# Altium PCB OpenHeat.PcbDoc (part 1 of 2)
Units mm, origin at the board's own origin, x right, y up, seen from the top; angles counter-clockwise.
Board outline 51.05 x 26.04 mm, 2 copper layers (Top1, Bottom4), stack 1.271 mm thick; 76 components, 78 nets, 393 pads, 281 vias.
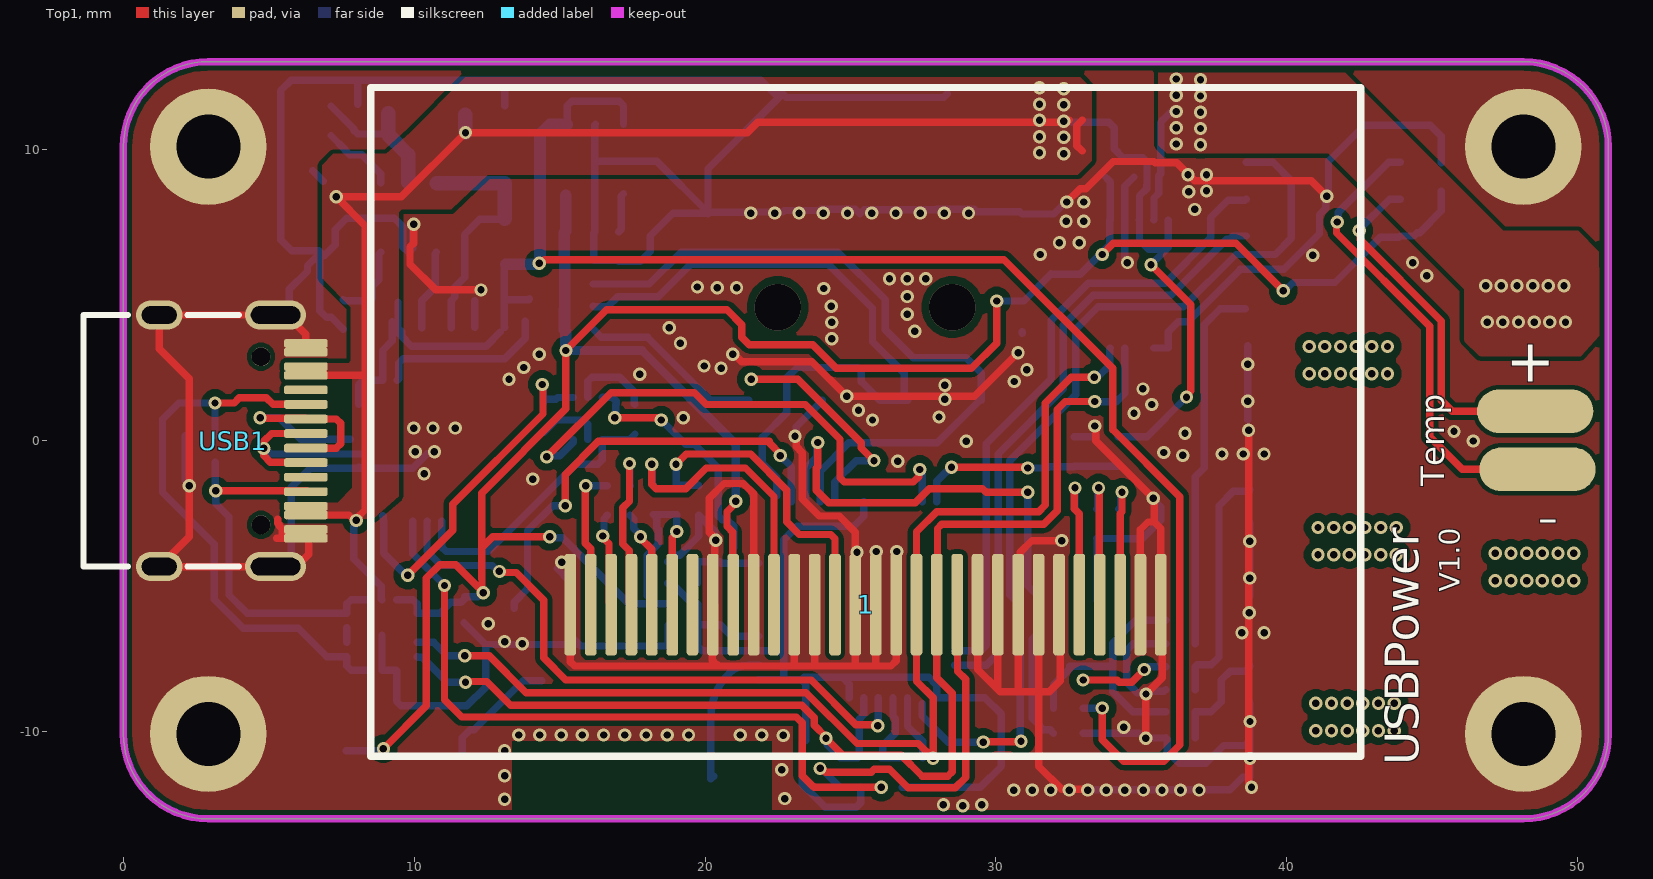
[diagram p0: Top1 view]
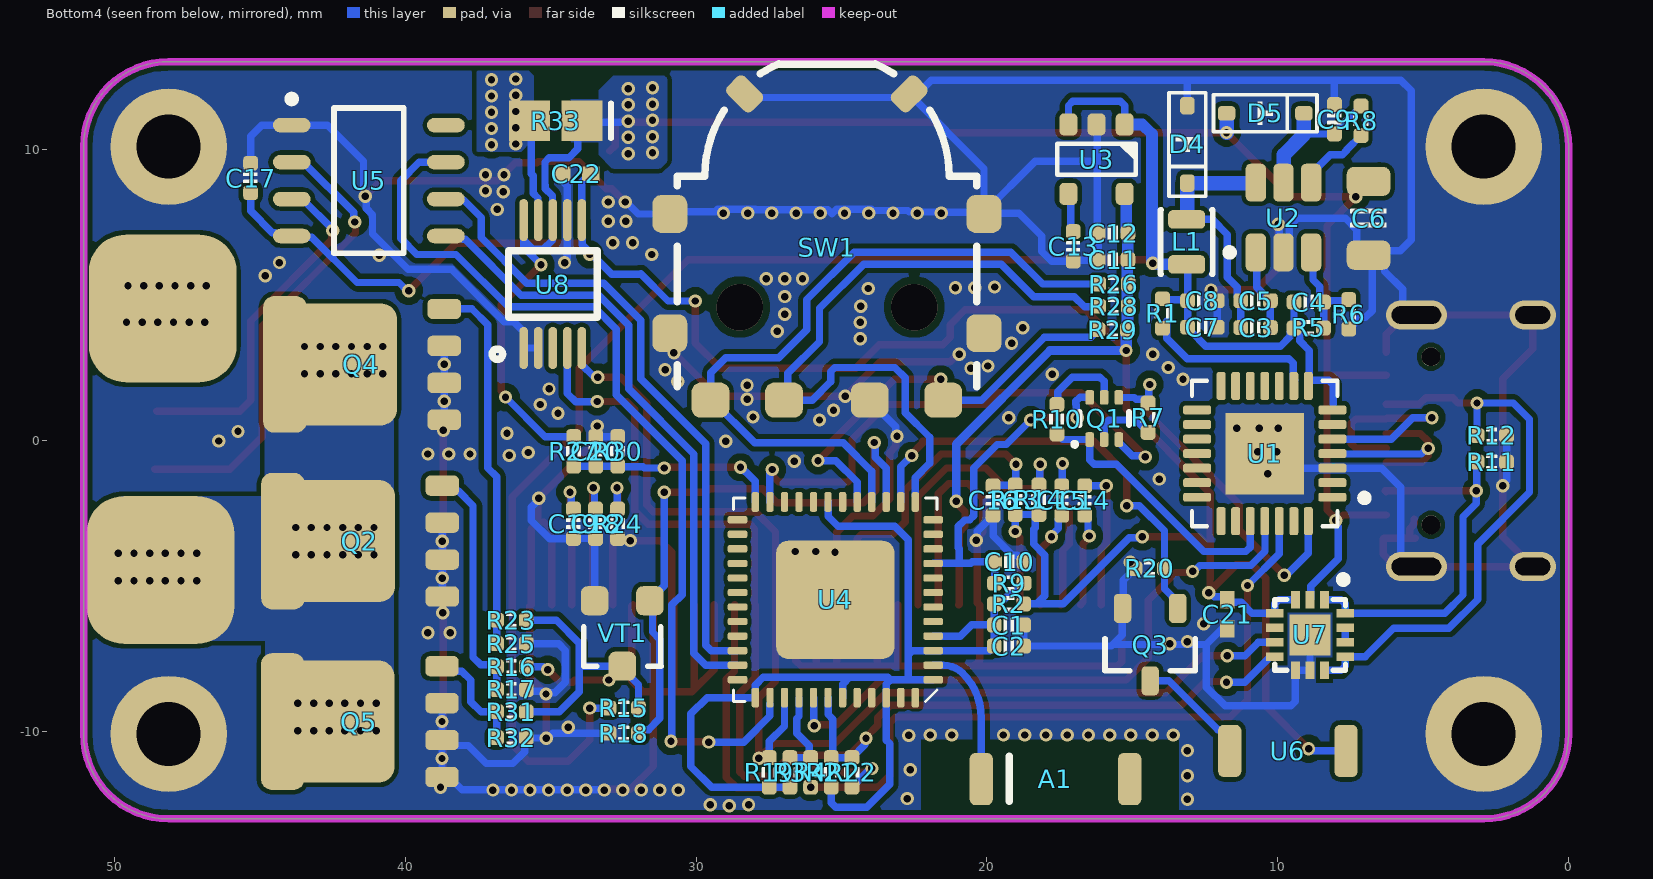
[diagram p1: Bottom4 view, seen from below]
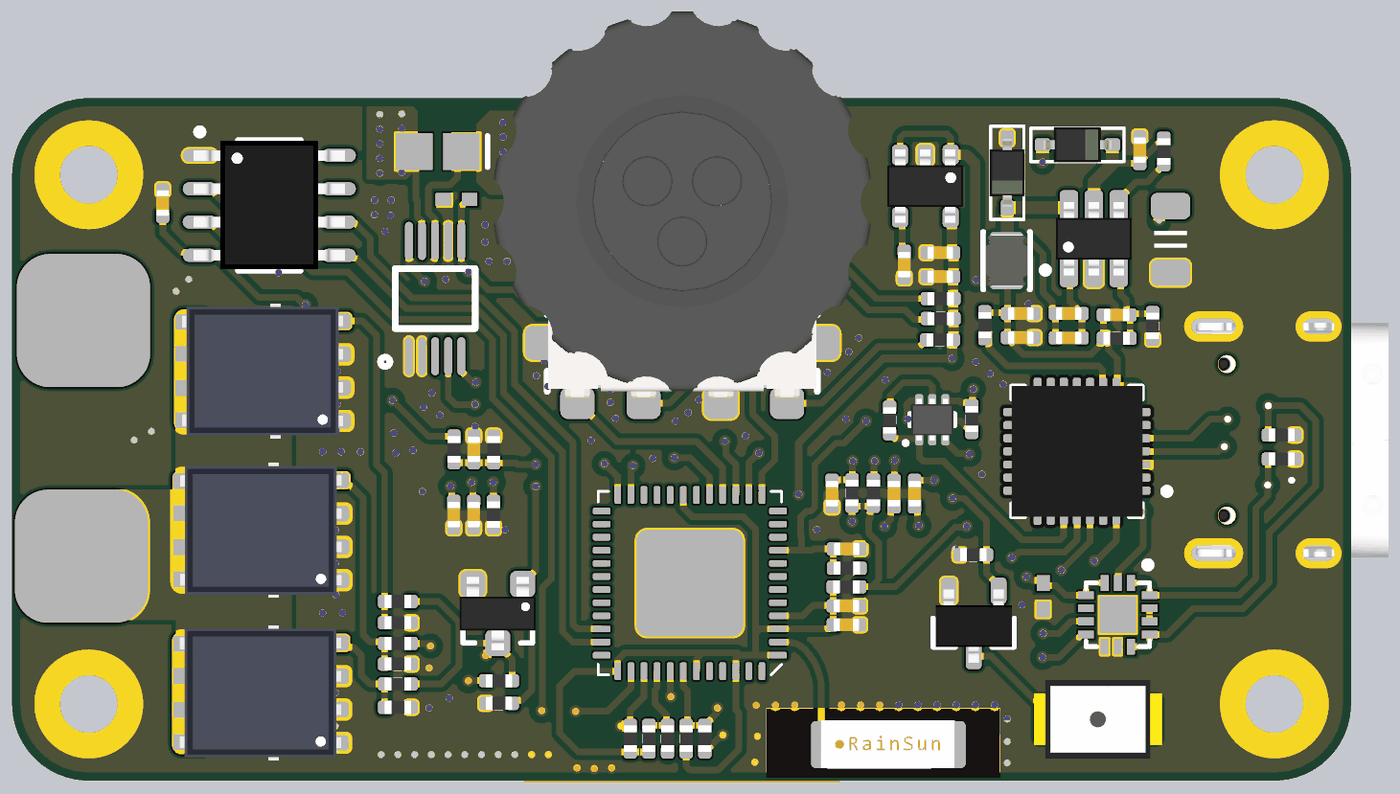
[diagram p3: 3D render of the assembled board from below, using the file's embedded part models]

## Layer stack, top to bottom
Top Solder: solder mask 0.0102, Solder Resist, Dk 3.5
Top1: signal copper 0.0356
Dielectric 1: core 1.2, FR-4, Dk 4.2
Bottom4: signal copper 0.0356
Bottom Solder: solder mask 0.0102, Solder Resist, Dk 3.5

## Board outline
0,-10.096 ccw(c2.921,-10.096) 2.921,-13.018 48.133,-13.018 ccw(c48.133,-10.096) 51.054,-10.096 51.054,10.096 ccw(c48.133,10.096) 48.133,13.018 2.921,13.018 ccw(c2.921,10.096) 0,10.096

## Design rules (kind name [scope] priority, off if disabled: settings)
Clearance [All] p1: gap=0.152 ignorepadtopadclearanceinfootprint=FALSE except(0.178: Arc-Fill Arc-Poly Arc-Region Track-Fill Track-Poly Track-Region; 0.254: Arc-THPad Arc-Via Track-THPad Track-Via SMDPad-THPad SMDPad-Via Via-Fill Via-Poly Via-Region Via-Hole; 0.356: THPad-Via Via-Via)
ComponentClearance [All] p1 off: gap=0 collisioncheckmode=3 verticalgap=0 showdistances=FALSE
DiffPairsRouting [All] p1: maxlimit=0.229 minlimit=0.229 mostfreqgap=0.229 toplayer_minwidth=0.102 toplayer_maxwidth=0.102 toplayer_prefwidth=0.102 bottomlayer_minwidth=0.102 bottomlayer_maxwidth=0.102 bottomlayer_prefwidth=0.102 maxuncoupledlength=12.7
FanoutControl Fanout_BGA [All] p1: bgadir=Out bgaviamode=Centered fanoutstyle=Auto fanoutdirection=Alternating viagrid=0.025 // Fanout_BGA (Default Rule)
HoleSize [All] p1: absolutevalues=TRUE maxlimit=254 minlimit=0.203 maxpercent=80.000 minpercent=20.000
MinimumSolderMaskSliver [All] p1 off: minsoldermaskwidth=0.051
PlaneClearance [All] p1: clearance=0.203
PlaneConnect [All] p1: planeconnectstyle=Direct reliefexpansion=0.508 reliefentries=4 reliefconductorwidth=0.254 reliefairgap=0.254
PolygonConnect MYGND [InNet('GND')] p1: connectstyle=Direct reliefconductorwidth=0.254 reliefentries=4 polygonreliefangle="90 Angle" airgapwidth=0.254
PolygonConnect VOUT [InNet('VOUT')] p2: connectstyle=Direct reliefconductorwidth=0.254 reliefentries=4 polygonreliefangle="90 Angle" airgapwidth=0.254
PolygonConnect VBUS [InNet('VUSB')] p3: connectstyle=Direct reliefconductorwidth=0.254 reliefentries=4 polygonreliefangle="90 Angle" airgapwidth=0.254
PolygonConnect POW [InNet('BED_OUT')] p4: connectstyle=Direct reliefconductorwidth=0.254 reliefentries=4 polygonreliefangle="90 Angle" airgapwidth=0.254
PolygonConnect [All] p5: thpad.connectstyle=Relief thpad.reliefconductorwidth=0.254 thpad.reliefentries=4 thpad.polygonreliefangle="90 Angle" thpad.airgapwidth=0.254 smdpad.connectstyle=Relief smdpad.reliefconductorwidth=0.254 smdpad.reliefentries=4 smdpad.polygonreliefangle="90 Angle" smdpad.airgapwidth=0.254 via.connectstyle=Direct via.reliefconductorwidth=0.254 via.reliefentries=4 via.polygonreliefangle="90 Angle" via.airgapwidth=0.254
RoomDefinition Power [InComponentClass('Power')] p1: confinementstyle=ConfineIn formatcopy=TRUE lockcomponents=FALSE outline -227.225,-128.407 -176.425,-128.407 -176.425,-103.007 -227.225,-103.007
RoomDefinition Main [InComponentClass('Main')] p2: confinementstyle=ConfineIn formatcopy=TRUE lockcomponents=FALSE outline -227.225,-128.407 -176.425,-128.407 -176.425,-103.007 -227.225,-103.007
RoutingVias [All] p1: holewidth=0.203 width=0.406 viastyle="Through Hole" minholewidth=0.152 minwidth=0.305 maxholewidth=0.711 maxwidth=1.27
SilkToBoardRegionClearance [All] p1 off:
SilkToSilkClearance [All] p1: silktosilkclearance=0
SilkToSolderMaskClearance [IsPad] p1: minsilkscreentomaskgap=0 clearancetoexposedcopper=TRUE
SolderMaskExpansion [All] p1: expansion=0.076 istentingtop=FALSE
Width [All] p1: maxlimit=0.254 minlimit=0.254 preferedwidth=0.254
Width VUSB [InNet('VUSB')] p2: maxlimit=0.5 minlimit=0.5 preferedwidth=0.5
Width POWER1 [(InNet('3V3A') OR InNet('GND'))] p3: maxlimit=0.254 minlimit=0.254 preferedwidth=0.254
20 further rules are at their usual default settings.

## Classes and differential pairs
component class Power: C21 C22 R33 U7 U8

## Components (designator, comment, footprint, x,y, rotation, side; value= is the part's Value field where it differs from the comment)
1 "OLED-12864" OLED-12864-1.3-TOP 25.527,1.206 r0 top locked
A1 "RAINSUN" ANT-Rainsun-AN5120 17.653,-11.646 r180 bottom
C1 "10uF" CAP_0402 19.241,-6.351 r0 bottom value=0.1u
C2 "0.1uF" CAP_0402 19.241,-7.074 r0 bottom value=0.1u
C3 "0.1uF" CAP_0402 10.762,3.873 r180 bottom value=0.1u
C4 "100pF" CAP_0402 8.932,4.75 r180 bottom value=0.1u
C5 "0.1uF" CAP_0402 10.762,4.801 r180 bottom value=0.1u
C6 "100uF" 1206-CAP 6.878,7.633 r90 bottom value=0.1u
C7 "0.1uF" CAP_0402 12.591,3.886 r0 bottom value=0.1u
C8 "10uF" CAP_0402 12.591,4.8 r0 bottom value=0.1u
C9 "10uF" CAP_0402 8.052,11.036 r270 bottom value=0.1u
C10 "0.1uF" CAP_0402 19.228,-4.178 r180 bottom value=0.1u
C11 "0.1uF" CAP_0402 15.661,6.21 r180 bottom value=0.1u
C12 "10uF" CAP_0402 15.661,7.125 r180 bottom value=0.1u
C13 "10nF" CAP_0402 17.033,6.667 r90 bottom value=0.1u
C14 "1uF" CAP_0402 16.637,-2.07 r270 bottom value=0.1u
C15 "1uF" CAP_0402 17.424,-2.07 r270 bottom value=0.1u
C16 "10uF" CAP_0402 19.787,-2.07 r90 bottom value=0.1u
C17 "0.1uF" CAP_0402 45.314,9.017 r90 bottom value=0.1u
C18 "10uF" CAP_0402 33.455,-2.87 r270 bottom value=0.1u
C19 "1uF" CAP_0402 34.214,-2.87 r270 bottom value=0.1u
C20 "270pF" CAP_0402 33.449,-0.381 r270 bottom value=0.1u
C21 "Cap" 0402 11.735,-5.982 r90 bottom value=100pF
C22 "Cap" 0402 34.112,9.157 r180 bottom value=100pF
D4 "二极管-5819W" SOD-323 13.106,10.173 r270 bottom
D5 "二极管-5819W" SOD-323 10.431,11.239 r180 bottom
L1 "6.8uH" IND-201612 13.132,6.82 r270 bottom
Q1 "BC847BVC-7" SOT563-6 15.965,0.749 r180 bottom
Q2 "NTMFS5C628NLT" SO8FL 41.449,-3.467 r90 bottom
Q3 "AO3400A" SOT23-3 14.387,-7.024 r270 bottom
Q4 "NTMFS5C628NLT" SO8FL 41.381,2.611 r90 bottom locked
Q5 "NTMFS5C628NLT" SO8FL 41.459,-9.672 r90 bottom
R1 "10K" RES_0402 13.962,4.356 r270 bottom value=22R
R2 "0R" RES_0402 19.241,-5.629 r0 bottom value=22R
R3 "10K" RES_0402 26.772,-11.417 r270 bottom value=22R
R4 "100R" RES_0402 26.06,-11.417 r270 bottom value=22R
R5 "10K" RES_0402 8.932,3.861 r0 bottom value=22R
R6 "1.8K" RES_0402 7.561,4.331 r90 bottom value=22R
R7 "12K" RES_0402 14.458,0.775 r270 bottom value=22R
R8 "1M" RES_0402 7.137,10.986 r270 bottom value=22R
R9 "10K" RES_0402 19.228,-4.915 r0 bottom value=22R
R10 "12K" RES_0402 17.591,0.724 r90 bottom value=22R
R11 "5.1K" RES_0402 2.642,-0.749 r0 bottom value=22R
R12 "5.1K" RES_0402 2.642,0.165 r180 bottom value=22R
R13 "10K" RES_0402 19.025,-2.045 r270 bottom value=22R
R14 "10K" RES_0402 18.212,-2.045 r90 bottom value=22R
R15 "1K" RES_0402 32.487,-9.207 r0 bottom value=22R
R16 "2.2R" RES_0402 36.347,-7.785 r180 bottom value=22R
R17 "100K" RES_0402 36.347,-8.572 r180 bottom value=22R
R18 "10K" RES_0402 32.487,-10.071 r0 bottom value=22R
R19 "10K" RES_0402 27.483,-11.417 r90 bottom value=22R
R20 "10K" RES_0402 14.402,-4.407 r180 bottom value=22R
R21 "10K" RES_0402 25.349,-11.417 r90 bottom value=22R
R22 "0R" RES_0402 24.638,-11.417 r90 bottom value=22R
R23 "2.2R" RES_0402 36.347,-6.185 r180 bottom value=22R
R24 "1M" RES_0402 32.696,-2.87 r90 bottom value=22R
R25 "100K" RES_0402 36.347,-6.998 r180 bottom value=22R
R26 "10K" RES_0402 15.646,5.372 r180 bottom value=22R
R27 "10K" RES_0402 34.207,-0.381 r270 bottom value=22R
R28 "10K" RES_0402 15.646,4.61 r180 bottom value=22R
R29 "10K" RES_0402 15.672,3.797 r180 bottom value=22R
R30 "1K" RES_0402 32.69,-0.381 r90 bottom value=22R
R31 "2.2R" RES_0402 36.347,-9.335 r180 bottom value=22R
R32 "100K" RES_0402 36.347,-10.223 r180 bottom value=22R
R33 "Res3" C2512 34.823,10.986 r0 bottom value=0.01
SW1 "Rotary Encoder" SIQ-02FVS3 25.5,9.08 r180 bottom locked
U1 "CP2102" QFN-28 10.447,-0.457 r0 bottom locked value=Value
U2 "ME3116" SOT23-6 9.804,7.658 r90 bottom
U3 "LP2992 3V3" SOT23-5 16.231,9.665 r270 bottom
U4 "ESP32_SIP" QFN-48_7X7 25.21,-5.483 r0 bottom
U5 "MAX6675ISA" SO-8 41.25,8.928 r180 bottom
U6 "DET402" DET402 9.652,-10.681 r0 bottom
U7 "U7" MCL14 8.89,-6.693 r270 bottom locked
U8 "INA226" SSOP10 34.925,5.372 r90 bottom
USB1 "Type-C" Type-C-TOP 3.754,-0.018 r180 top locked
VT1 "S8050" SMT_TRIODE_NPN 32.537,-6.642 r0 bottom

## Footprints (in the part's own frame and the unit in brackets; to place one, negate y for a bottom-side part, rotate by r counter-clockwise, add the part's x,y. Pads: shape width x height; smd on the part's side, far side on the other; paste and mask are expansions set on the pad)
0402 [mm] "Chip Capacitor, Body 1.0x0.5mm, IPC High Density"
  rect 0.6x0.5 smd: 1(-0.5,0) 2(0.5,0)
  body extent -0.55,-0.3 0.55,0.3, height 1.3
1206-CAP [mm]
  rrect50% 1x1.5 smd: 1(-1.27,0) 2(1.27,0)
  silkscreen extent -0.3,-0.61 0.3,0.61, body extent -1.5,-0.75 1.5,0.75, height 1.5
ANT-Rainsun-AN5120 [mm] "选择焊盘"
  rrect50% 0.8x1.8 smd: 1(-2.54,0) ""(2.563,0)
  silkscreen extent -1.57,-0.76 -1.57,0.79, body extent -2.57,-0.91 2.54,0.94, height 1.32
C2512 [mm] "Chip Capacitor, Body 2.54x1.27mm, IPC High Density"
  rect 1.4x1.4 smd: 1(-0.9,0) 2(0.9,0)
  silkscreen extent -1.9,-0.6 -1.9,0.6, body extent -1.45,-0.82 1.45,0.82, height 1.3
CAP_0402 [mil]
  rrect50% 20x20 smd: 1(-20,0) 2(20,0)
  silkscreen extent -6,-9 6,9, body extent -20,-10 20,10, height 20
DET402 [mm]
  rrect50% 0.8x1.8 smd: 1(-2,0) 2(2,0)
  body extent -2.45,-1.5 2.44,1.5, height 2.03
IND-201612 [mm]
  rrect50% 0.635x1.27 smd paste+0 mask+0: 1(-0.774,0) 2(0.774,0)
  silkscreen extent -1.1,-0.9 1.1,0.9, body extent -1,-0.8 1,0.8, height 0.95
MCL14 [mm]
  rect 0.6x0.3 smd: 1(-1.215,0.5) 2(-1.215,0) 3(-1.215,-0.5) 8(1.215,-0.5) 9(1.215,0) 10(1.215,0.5)
  rect 0.3x0.6 smd: 4(-0.75,-1.215) 5(-0.25,-1.215) 6(0.25,-1.215) 7(0.75,-1.215) 11(0.75,1.215) 12(0.25,1.215) 13(-0.25,1.215) 14(-0.75,1.215)
  rect 1.4x1.4 smd: 15(0,0)
  silkscreen extent -2.03,-1.21 1.21,1.27, body extent -1.21,-1.19 1.24,1.2, height 0.25
OLED-12864-1.3-TOP [mm]
  rrect50% 0.4x3.5 smd: 1(-10.16,-6.858) 2(-9.46,-6.858) 3(-8.76,-6.858) 4(-8.06,-6.858) 5(-7.36,-6.858) 6(-6.66,-6.858) 7(-5.96,-6.858) 8(-5.26,-6.858) 9(-4.56,-6.858) 10(-3.86,-6.858) 11(-3.16,-6.858) 12(-2.46,-6.858) 13(-1.76,-6.858) 14(-1.06,-6.858) 15(-0.36,-6.858) 16(0.34,-6.858) 17(1.04,-6.858) 18(1.74,-6.858) 19(2.44,-6.858) 20(3.14,-6.858) 21(3.84,-6.858) 22(4.54,-6.858) 23(5.24,-6.858) 24(5.94,-6.858) 25(6.64,-6.858) 26(7.34,-6.858) 27(8.04,-6.858) 28(8.74,-6.858) 29(9.44,-6.858) 30(10.14,-6.858)
  silkscreen extent -17.02,-12.06 17.02,10.92, body extent -17,-14.29 17,11.07, height 4.6
QFN-28 [mil]
  rrect50% 38x12 smd mask+5: 1(-91.5,59.06) 2(-91.5,39.37) 3(-91.5,19.68) 4(-91.5,0) 5(-91.5,-19.69) 6(-91.5,-39.37) 7(-91.5,-59.06) 15(91.5,-59.06) 16(91.5,-39.37) 17(91.5,-19.69) 18(91.5,0) 19(91.5,19.68) 20(91.5,39.37) 21(91.5,59.06)
  rrect50% 12x38 smd mask+5: 8(-59.06,-91.5) 9(-39.37,-91.5) 10(-19.68,-91.5) 11(0,-91.5) 12(19.69,-91.5) 13(39.37,-91.5) 14(59.06,-91.5) 22(59.06,91.5) 23(39.37,91.5) 24(19.69,91.5) 25(0,91.5) 26(-19.68,91.5) 27(-39.37,91.5) 28(-59.06,91.5)
  rect 106.3x110.24 smd: 29(0,0)
  silkscreen extent -140,-98 98,98, body extent -99,-99 98,98, height 35
QFN-48_7X7 [mm]
  rrect50% 0.675x0.25 smd: 1(-3.363,2.75) 2(-3.363,2.25) 3(-3.363,1.75) 4(-3.363,1.25) 5(-3.363,0.75) 6(-3.363,0.25) 7(-3.363,-0.25) 8(-3.363,-0.75) 9(-3.363,-1.25) 10(-3.363,-1.75) 11(-3.363,-2.25) 12(-3.363,-2.75) 25(3.363,-2.75) 26(3.363,-2.25) 27(3.363,-1.75) 28(3.363,-1.25) 29(3.363,-0.75) 30(3.363,-0.25) 31(3.363,0.25) 32(3.363,0.75) 33(3.363,1.25) 34(3.363,1.75) 35(3.363,2.25) 36(3.363,2.75)
  rrect50% 0.25x0.675 smd: 13(-2.75,-3.363) 14(-2.25,-3.363) 15(-1.75,-3.363) 16(-1.25,-3.363) 17(-0.75,-3.363) 18(-0.25,-3.363) 19(0.25,-3.363) 20(0.75,-3.363) 21(1.25,-3.363) 22(1.75,-3.363) 23(2.25,-3.363) 24(2.75,-3.363) 37(2.75,3.363) 38(2.25,3.363) 39(1.75,3.363) 40(1.25,3.363) 41(0.75,3.363) 42(0.25,3.363) 43(-0.25,3.363) 44(-0.75,3.363) 45(-1.25,3.363) 46(-1.75,3.363) 47(-2.25,3.363) 48(-2.75,3.363)
  rrect20% 4.064x4.064 smd: 49(0,0)
  silkscreen extent -3.5,-3.5 3.5,3.5, body extent -3.5,-3.5 3.5,3.5, height 1
RES_0402 [mil]
  rrect50% 20x20 smd: 1(-20,0) 2(20,0)
  silkscreen extent -7,-10 7,10, body extent -20,-10 20,10, height 14
SIQ-02FVS3 [mm]
  rrect50% 1.3x1.2 smd: 1(-4,-7.7) 2(-1.475,-7.7) 3(1.475,-7.7) 4(4,-7.7)
  rrect50% 1.2x1.3 smd: 5(-5.4,-5.4) 5(-5.4,-1.3) 5(5.4,-5.4) 5(5.4,-1.3)
  rrect50% 0.85x1.2 smd rot 45: 5(-2.828,2.828)
  rrect50% 0.85x1.2 smd rot 135: 5(2.828,2.828)
  silkscreen extent -5.15,-7.25 5.15,3.86, body extent -7.2,-7.5 7.2,7.25, height 4.06
SMT_TRIODE_NPN [mm] "Surface mount NPN transistor, package SOT-23"
  rrect50% 0.95x1 smd: 1(-0.95,-1.125) 2(0.95,-1.125) 3(0,1.125)
  silkscreen extent -1.33,-0.22 1.32,1.13, body extent -1.45,-1.4 1.45,1.4, height 1.3
SO8FL [mm] "DFN5 5x6, 1.27P  (SO-8FL)  CASE 488AA"
  rect 0.9x0.6 on Bottom Paste: 7(0,-0.55) 7(0,0.3) 7(0,1.15) 7(0,2) 9(-1.15,-0.55) 9(-1.15,0.3) 9(-1.15,1.15) 9(-1.15,2) 10(1.15,-0.55) 10(1.15,0.3) 10(1.15,1.15) 10(1.15,2)
  rect 0.6x0.9 on Bottom Paste: 11(-1.875,3) 11(-0.65,3) 11(0.65,3) 11(1.875,3)
  rrect50% 4.2x2.2 smd paste-10 mask+0.075: D(0,0)
  rect 4.2x2.2 smd paste-10 mask+0.075: D(0,1.35)
  rrect50% 4.7x1.5 smd paste-10 mask+0.075: D(0,2.75)
  rrect50% 0.7x1.15 smd paste-0.05 mask+0.075: G(1.905,-2.725) S(-1.905,-2.725) S(-0.635,-2.725) S(0.635,-2.725)
  body extent -2.57,-2.95 2.58,3.2, height 1.13
SO-8 [mm]
  oval 1.3x0.5 smd: 1(-2.65,1.905) 2(-2.65,0.635) 3(-2.65,-0.635) 4(-2.65,-1.905) 5(2.65,-1.905) 6(2.65,-0.635) 7(2.65,0.635) 8(2.65,1.905)
  silkscreen extent -2.78,-2.5 1.2,2.93, body extent -2.89,-2.44 2.89,2.46, height 1.45
SOD-323 [mm]
  rrect50% 0.6x0.5 smd: 1(-1.329,0) 2(1.329,0)
  silkscreen extent -1.78,-0.64 1.78,0.64, body extent -1.3,-0.68 1.3,0.67, height 1.15
SOT23-3 [mm] "SOT23, 3-Leads, Body 3.1x3.0mm (max), Pitch 0.95mm, IPC Medium Density"
  rrect50% 1x0.6 smd: 1(-1.246,0.95) 2(-1.246,-0.95) 3(1.246,0)
  silkscreen extent -0.2,-1.55 0.9,1.55, body extent -1.3,-1.45 1.5,1.45, height 1.2
SOT23-5 [mil]
  rrect50% 30x24 smd: 1(-47,38) 2(-47,0) 3(-47,-38) 4(47,-38) 5(47,38)
  silkscreen extent -21,-53 21,53, body extent -55,-57 55,57, height 57
SOT23-6 [mm]
  rrect50% 1.3x0.7 smd: 1(-1.2,0.95) 2(-1.2,0) 3(-1.2,-0.95) 4(1.2,-0.95) 5(1.2,0) 6(1.2,0.95)
  silkscreen extent -1.32,1.73 -1.08,1.98, body extent -1.4,-1.45 1.4,1.45, height 1.45
SOT563-6 [mm]
  rrect50% 0.305x0.5 smd paste+0 mask+0: 1(-0.5,-0.723) 2(0,-0.723) 3(0.5,-0.723) 4(0.5,0.723) 5(0,0.723) 6(-0.5,0.723)
  silkscreen extent -1.09,-0.97 0.85,0.23, body extent -0.8,-0.8 0.8,0.8, height 0.6
SSOP10 [mm]
  oval 1.45x0.3 smd: 1(-2.2,1) 2(-2.2,0.5) 3(-2.2,0) 4(-2.2,-0.5) 5(-2.2,-1) 6(2.2,-1) 7(2.2,-0.5) 8(2.2,0) 9(2.2,0.5) 10(2.2,1)
  silkscreen extent -2.59,-1.52 1.14,2.08, body extent -1.78,-1.52 1.78,1.52, height 1.1
Type-C-TOP [mm]
  round 0.65 hole 0.65: 0(-0.98,2.89) 0(-0.98,-2.89)
  oval 1.6x1 hole 0.6 slot 1.2 at 0 deg: 1(2.52,4.325) 2(2.52,-4.325)
  oval 2.1x1 hole 0.6 slot 1.7 at 0 deg: 3(-1.48,-4.325) 4(-1.48,4.325)
  rrect50% 1.5x0.3 smd: A1(-2.52,-3.35) A4(-2.52,-2.55) A5(-2.52,-1.25) A6(-2.52,-0.25) A7(-2.52,0.25) A8(-2.52,1.25) A9(-2.52,2.55) A12(-2.52,3.35) B1(-2.52,3.05) B4(-2.52,2.25) B5(-2.52,1.75) B6(-2.52,0.75) B7(-2.52,-0.75) B8(-2.52,-1.75) B9(-2.52,-2.25) B12(-2.52,-3.05)
  silkscreen extent -0.22,-4.33 5.12,4.33, body extent -2.57,-4.48 5.18,4.48, height 3.26

## Part data
1: "显示屏"
A1: library part ANT-Rainsun-AP5120
C1 C2 C3 C4 C5 C7 C8 C9 C10 C11 C12 C13 C14 C15 C16 C17 C18 C19 C20: library part 电容-0402, "Capacitor"
C6: library part 电容-1206, "Capacitor"
C21 C22: "Capacitor", LatestRevisionDate=17-Jul-2002, LatestRevisionNote="Re-released for DXP Platform.", PackageDescription="Radial Cap, Thru-Hole; 2 Leads; 0.3 in Pin Spacing", PackageReference=RAD-0.3, Published=8-Jun-2000, Publisher="Altium Limited"
D4 D5: "40V"
L1: library part 电感-201612
Q2 Q4 Q5: "MOSFET N-CH 60V SO8FL", Current - Continuous Drain (Id) @ 25°C=-, Drive Voltage (Max Rds On,  Min Rds On)="4.5V, 10V", Input Capacitance (Ciss) (Max) @ Vds="3600pF @ 25V", Manufacturer="ON Semiconductor", Manufacturer Part Number=NTMFS5C628NLT1G, Operating Temperature="-55°C ~ 175°C (TJ)", Package / Case=8-PowerTDFN, Power Dissipation (Max)="3.7W (Ta), 110W (Tc)", Supplier Device Package="5-DFN (5x6) (8-SOFL)", Supplier Part Number 1=NTMFS5C628NLT1GOSCT-ND, Category="Discrete Semiconductor Products", ComponentLink1Description=http://www.onsemi.com/pub/Collateral/NTMFS5C628NL-D.PDF, ComponentLink1URL=http://www.onsemi.com/pub/Collateral/NTMFS5C628NL-D.PDF, FET Feature=-, FET Type=N-Channel, Gate Charge (Qg) (Max) @ Vgs="52nC @ 10V", Mounting Type="Surface Mount", Packaging="Cut Tape (CT)", Part Status=Active, Pricing 1="1=1.8, 10=1.627, 100=1.3078, 500=1.01716 (USD)", Pricing 2="1500=0.81823 (USD)", Rds On (Max) @ Id, Vgs="2.4 mOhm @ 50A, 10V", RoHS="RoHS Compliant", Stock=1490, Supplier 1=Digi-Key, Supplier 2=Digi-Key, Supplier Part Number 2=NTMFS5C628NLT1GOSTR-ND, Technology="MOSFET (Metal Oxide)", Vgs (Max)=±20V, Vgs(th) (Max) @ Id="2V @ 135µA"
Q3: "N-MOS"
R1 R2 R3 R4 R5 R6 R7 R8 R9 R10 R11 R12 R13 R14 R15 R16 R17 R18 R19 R20 R21 R22 R23 R24 R25 R26 R27 R28 R29 R30 R31 R32: library part 电阻-0402, "Resistor"
R33: "Resistor", LatestRevisionDate=29-May-2009, LatestRevisionNote="IPC-7351 Footprint Added.", PackageDescription="Chip Resistor", PackageReference=J1-0603, Published=8-Jun-2000, Publisher="Altium Limited"
SW1: BOM_JLCPCB Part Class="Extended Part", BOM_Manufacturer=ALPSALPINE, BOM_Manufacturer Part=EC11E1534443, BOM_Supplier=LCSC, BOM_Supplier Part=C1322543, Contributor=LCSC, spicePre=S, spiceSymbolName=EC11E1534443
U1: "USB转TTL", MFG #1="SILICON LABS", PART DESC="SINGLE-CHIP USB TO UART BRIDGE, QFN28, RoHS.", PART NUMBER=CP2102, RefDes=RefDes, Type=DEV
U2: "DC-DC"
U3: library part LP2992, "LDO"
U4: library part ESP32-PICO
U5: "IC THERMOCOUP TO DGTL 8-SOIC", Digikey Part Number=MAX6675ISA+-ND, Manufacturer="Maxim Electronics", max_supply_voltage_dc=5.50V, Mfg Package Ident=21-0041, Mouser Part Number=700-MAX6675ISA, Octopart Part Number=33bcfab92ad8ec7b, PART NUMBER=MAX6675ISA+, supply_current="0.70 mA", Temperature="-20°C to +85°C", Temperature Range High=+85°C, Temperature Range Low=-20°C, Category 2Fc5E2Cf1B85F402="Interface ICs", Category 3B3Df6370Ab4E0Fa="Temperature Sensor ICs", Category 3Cb8F1B20D37E77F="Sensors (Acceleration, Pressure, ...)", Category 6B95A69F5F75B052="Sensors and Accessories", Category 8A76477Cb9Bd51B1="Temperature Control and Regulation", Category 9E07530Daf1645C0="Semiconductors and Actives", Category 20B3Edb914A9Fb74=Uncategorized, Category 84F649Fcb0Ed5F31=Uncategorized, Category C33B0E31F09B18Fc="Temperature Sensor ICs", Category D46C1966E09E0Fab=Temperature, Category Db391633E8F300Fe="Industrial Control", Category E95E2454Daf93299="Temperature Sensing/Measurement", ComponentLink1Description=Upverter, ComponentLink1URL=https://upverter.com/upn/revision/df8f98e99e77f28c/, ComponentLink2Description=Datasheet, ComponentLink2URL=https://upverter.com/datasheet/328f41e80cd5fba93d602566d8324382201f26da.pdf, Digikey Description="IC THERMOCOUP TO DGTL 8-SOIC", helpURL=https://upverter.com/upn/revision/df8f98e99e77f28c/, Ipc Land Pattern Name=SOIC127P600X155-8, Lead Free=yes, Mounting Type="surface mount", Num Pins=8, Package=21-0041, RoHS=TRUE, Supplier 1=Digi-Key, Supplier 2=Mouser, Supplier Part Number 1=MAX6675ISA+-ND, Supplier Part Number 2=700-MAX6675ISA, Symbol 0 0=Standard, Type="integrated circuit"
U7: library part FUSB302B
USB1: library part USB-Type-C-TOP
VT1: library part SMT_TRIODE_NPN, "Surface mount NPN transistor, package SOT-23"

## Free pads (board coordinates)
  oval 4x1.5 smd: 2(48.616,-1) 3(48.539,1)
  round 4 hole 2.2: ""(2.921,-10.096) ""(2.921,10.097) ""(48.133,-10.096) ""(48.133,10.097)
  rrect50% 5.08x5.08 smd far side: ""(48.336,4.534) ""(48.412,-4.458)

## Via types
v1: diameter 0.457, hole 0.254, Top1 to Bottom4, tented both sides, 279 vias
v2: diameter 1.6, hole 1.6, Top1 to Bottom4, 2 vias

## Nets (pads, with @x,y where several pads share a name; then routed paths per layer and width w, separated by ;. In a path a pad name is that pad's centre, name@x,y a point inside that pad or via, vN(x,y) a via of type N, cw(c..) or ccw(c..) an arc to the next point about the centre after c; other vN are vias at no path point)
3V3A: C1.2 C2.2 R2.2 R3.2 R9.1 R19.1 R21.1 U4.1 U4.3 U4.4 U4.19 U4.37 U4.43 U4.46 | length 38.6
  Bottom4 w0.254: R9.1@18.72,-4.915 18.847,-5.042 18.974,-5.042 19.434,-5.502 19.621,-5.502 R2.2@19.748,-5.629 C1.2@19.748,-6.351 ; U4.1@21.848,-8.233 21.85,-8.231 22.254,-8.231 22.256,-8.229 22.708,-8.229 ; U4.4@21.848,-6.733 20.919,-6.733 20.523,-6.337 19.762,-6.337 C1.2@19.748,-6.351 ; U4.43@24.96,-8.846 24.958,-8.844 24.958,-8.385 24.714,-8.141 ; R21.1@25.349,-11.925 25.349,-12.462 25.2,-12.611 24.13,-12.611 23.343,-11.824 23.343,-10.427 23.46,-10.309 U4.46@23.46,-8.846 23.46,-8.378 23.311,-8.229 ; U4.19@25.458,-2.119 U4.19@25.46,-2.121 25.458,-2.123 25.458,-2.621 25.121,-2.959 23.165,-2.959 22.708,-3.416 22.708,-7.382 ; R3.2@26.772,-11.925 R19.1@27.483,-11.925 29.464,-11.925 30.175,-11.214 30.175,-9.407 29.614,-8.846 U4.37@27.96,-8.846 27.96,-8.637 27.965,-8.632 27.965,-8.42 27.686,-8.141 24.714,-8.141 ; C1.2@19.748,-6.351 C2.2@19.748,-7.074 19.908,-7.233 U4.3@21.848,-7.233 22.559,-7.233 22.708,-7.382 ; 22.708,-8.229 23.311,-8.229 ; 22.708,-8.229 22.708,-7.382 ; 23.311,-8.229 23.4,-8.141 24.714,-8.141
5V: C4.1 C7.2 C8.2 L1.2 R1.1 R5.2 R15.2 U1.7 U1.8 U3.1 U3.3 | length 61.9
  Top1 w0.254: v1(14.3,6.083) 14.355,6.083 14.482,6.21 30.277,6.21 34.011,2.476 34.011,0.368 36.322,-1.943 36.322,-10.477 35.763,-11.036 34.392,-11.036 33.655,-10.3 v1(33.655,-9.207)
  Bottom4 w0.254: 8.09,1.233 8.09,1.905 8.242,2.057 8.914,2.057 8.914,3.085 9.246,3.416 R5.2@9.246,4.072 ; R5.2@9.398,3.818 R5.2@9.44,3.861 ; R5.2@9.415,3.729 R5.2@9.489,3.655 ; C4.1@9.44,4.75 R5.2@9.44,3.861 ; C7.2@12.954,3.721 12.471,3.238 9.906,3.238 9.567,3.577 9.567,3.734 R5.2@9.44,3.861 ; C7.2@13.106,3.878 C7.2@13.099,3.886 C8.2@13.099,4.8 ; L1.2@13.144,6.058 13.099,6.013 C8.2@13.099,4.8 ; R1.1@13.962,4.864 13.931,4.832 13.13,4.832 C8.2@13.099,4.8 ; U3.1@15.265,10.858 15.265,11.51 15.414,11.659 17.047,11.659 17.196,11.51 U3.3@17.196,10.858 ; R15.2@32.995,-9.207 v1(33.655,-9.207)
  Bottom4 w0.4: L1.2@13.144,6.058 v1@14.177,6.058 ; v1@14.326,6.207 14.326,10.528 14.656,10.858 U3.1@15.265,10.858
Alert: U8.3
BED_OUT: pad.@48.412,-4.458 Q2.D Q4.D Q5.D
  other v1: 40.996,-9.982 41.534,-9.982 42.073,-9.982 42.611,-9.982 43.15,-9.982 43.688,-9.982 40.996,-9.042 41.534,-9.042 42.073,-9.042 42.611,-9.042 43.15,-9.042 43.688,-9.042 47.168,-4.826 47.706,-4.826 48.245,-4.826 48.783,-4.826 49.322,-4.826 49.86,-4.826 41.072,-3.937 41.61,-3.937 42.149,-3.937 42.687,-3.937 43.226,-3.937 43.764,-3.937 47.168,-3.886 47.706,-3.886 48.245,-3.886 48.783,-3.886 49.322,-3.886 49.86,-3.886 41.072,-2.997 41.61,-2.997 42.149,-2.997 42.687,-2.997 43.226,-2.997 43.764,-2.997 40.767,2.286 41.305,2.286 41.844,2.286 42.382,2.286 42.921,2.286 43.459,2.286 40.767,3.226 41.305,3.226 41.844,3.226 42.382,3.226 42.921,3.226 43.459,3.226
BS1: 1.11 R14.2 | length 10.1
  Top1 w0.254: v1(18.161,-0.826) 18.161,-1.515 18.31,-1.664 19.329,-1.664 20.041,-0.953 21.387,-0.953 22.367,-1.933 1.11@22.367,-5.651
  Bottom4 w0.254: v1(18.161,-0.826) 18.186,-0.851 18.186,-1.511 R14.2@18.212,-1.537
BUZZ: Q3.1 R20.2 U4.14 | length 15.5
  Top1 w0.254: v1(15.189,-2.248) 15.189,-1.181 16.332,-0.038 22.2,-0.038 22.2,-0.09 22.581,-0.471 v1(22.581,-0.526)
  Bottom4 w0.254: Q3.1@13.437,-5.779 13.437,-5.566 13.894,-5.109 R20.2@13.894,-4.407 13.894,-3.111 14.757,-2.248 v1(15.189,-2.248) ; v1(22.581,-0.526) 22.586,-0.526 22.96,-0.9 U4.14@22.96,-2.121
CC1: R12.1 U7.10 U7.11 USB1.A5 | length 19.8
  Top1 w0.254: v1(3.15,1.283) 3.812,1.283 3.99,1.46 4.915,1.46 5.143,1.233 USB1.A5@6.274,1.233
  Bottom4 w0.254: R12.1@3.15,0.165 v1(3.15,1.283) 1.905,1.283 1.346,0.724 1.346,-1.791 3.124,-3.569 3.124,-5.474 4.115,-6.464 6.02,-6.464 6.998,-7.443 U7.11@7.675,-7.443 7.675,-7.759 7.824,-7.908 U7.10@8.39,-7.908
CC2: R11.2 U7.1 U7.14 USB1.B5 | length 13.3
  Top1 w0.254: v1(3.175,-1.74) 6.299,-1.74 6.274,-1.765 USB1.B5@6.274,-1.767
  Bottom4 w0.254: R11.2@3.15,-0.749 3.162,-0.762 3.162,-1.727 v1(3.175,-1.74) 3.175,-2.172 3.632,-2.629 3.632,-5.321 4.254,-5.943 U7.14@7.675,-5.943 7.675,-5.627 7.824,-5.478 U7.1@8.39,-5.478
CP_Rx: U1.25 U4.41 | length 21.2
  Top1 w0.254: v1(12.929,-4.508) 12.967,-4.547 13.501,-4.547 14.453,-5.499 14.453,-7.48 15.215,-8.242 23.647,-8.242 25.185,-9.78 25.896,-9.78 v1(25.933,-9.817)
  Bottom4 w0.254: U1.25@10.447,-2.781 10.439,-2.789 10.439,-3.815 10.93,-4.305 12.678,-4.305 12.881,-4.508 v1(12.929,-4.508) ; v1(25.933,-9.817) 25.958,-9.792 25.958,-8.848 U4.41@25.96,-8.846
CP_Tx: R3.1 R4.1 U4.40 | length 3
  Bottom4 w0.254: U4.40@26.46,-8.846 26.46,-9.482 26.543,-9.565 26.543,-10.07 26.104,-10.509 26.104,-10.866 R4.1@26.06,-10.909 R3.1@26.772,-10.909
CS: U4.34 U5.6 | length 22.1
  Bottom4 w0.254: U4.34@28.573,-7.233 29.482,-7.233 29.667,-7.048 29.667,-0.114 31.902,2.121 31.902,4.127 33.172,5.397 35.814,5.397 37.389,6.972 37.389,7.658 37.977,8.246 38.553,8.246 U5.6@38.6,8.293
DTR: Q1.4 R7.1 U1.28 | length 12.5
  Top1 w0.254: v1(9.779,-4.635) 11.323,-3.092 11.323,-2.203 14.427,0.902 14.427,1.892 v1(14.402,1.918)
  Bottom4 w0.254: U1.28@8.914,-2.591 8.922,-2.591 8.941,-2.61 8.941,-2.759 8.952,-2.77 8.952,-3.885 9.601,-4.534 9.622,-4.534 9.724,-4.635 v1(9.779,-4.635) ; v1(14.402,1.918) 14.43,1.89 14.43,1.311 R7.1@14.443,1.298 ; R7.1@14.585,1.41 14.869,1.41 14.932,1.472 Q1.4@15.465,1.472
EC_A: R26.1 SW1.1 U4.16 | length 24.7
  Bottom4 w0.254: R26.1@16.154,5.372 18.085,5.372 19.177,6.464 24.562,6.464 26.187,4.839 26.187,3.797 27.153,2.832 28.981,2.832 29.489,2.324 29.489,1.42 SW1.1@29.45,1.381 ; U4.16@23.96,-2.121 23.96,-1.071 24.943,-0.089 27.981,-0.089 SW1.1@29.45,1.381 ; SW1.1@29.5,1.381 SW1.1@29.45,1.381
EC_B: R29.1 SW1.4 U4.17 | length 14.1
  Top1 w0.254: v1(21.59,2.095) 23.19,2.095 25.374,-0.089 25.374,-0.267 v1(25.806,-0.699)
  Bottom4 w0.254: R29.1@16.18,3.797 16.434,3.543 18.021,3.543 20.184,1.381 SW1.4@21.5,1.381 ; U4.17@24.46,-2.121 24.46,-1.435 25.197,-0.699 v1(25.806,-0.699)
EC_KEY: R28.1 SW1.2 U4.13 | length 24.1
  Bottom4 w0.254: R28.1@16.154,4.61 16.18,4.585 16.643,4.585 16.999,4.94 18.39,4.94 19.507,6.058 24.232,6.058 25.756,4.534 25.756,3.391 26.848,2.299 26.848,1.508 SW1.2@26.975,1.381 26.006,1.381 25.375,2.012 25.375,2.353 25.226,2.502 23.165,2.502 22.809,2.146 22.809,0.953 21.971,0.114 21.971,-0.794 22.46,-1.283 U4.13@22.46,-1.91
ESP_EN: C10.1 Q1.6 R9.2 U4.9 | length 11.9
  Top1 w0.254: v1(16.891,0.775) 18.36,0.775 18.436,0.699 v1(18.491,0.699)
  Bottom4 w0.254: Q1.6@16.465,1.472 16.479,1.486 16.793,1.486 16.942,1.337 16.942,1.232 16.93,1.22 16.93,0.814 v1(16.891,0.775) ; v1(18.491,0.699) 19.336,-0.146 19.641,-0.146 20.447,-0.953 20.447,-2.592 20.596,-2.741 20.766,-2.741 20.98,-2.955 20.98,-3.698 20.953,-3.725 20.953,-4.233 ; R9.2@19.736,-4.915 C10.1@19.736,-4.178 20.498,-4.178 20.553,-4.233 20.953,-4.233 ; U4.9@21.848,-4.233 20.953,-4.233
FLASH_CLK: U4.31
FLASH_CS: U4.25
FLASH_SD0: U4.27
FLASH_SD1: U4.33
FLASH_SD2: U4.30
FLASH_SD3: U4.32